# EAGLE board rev0 (EAGLE 9.6.2)
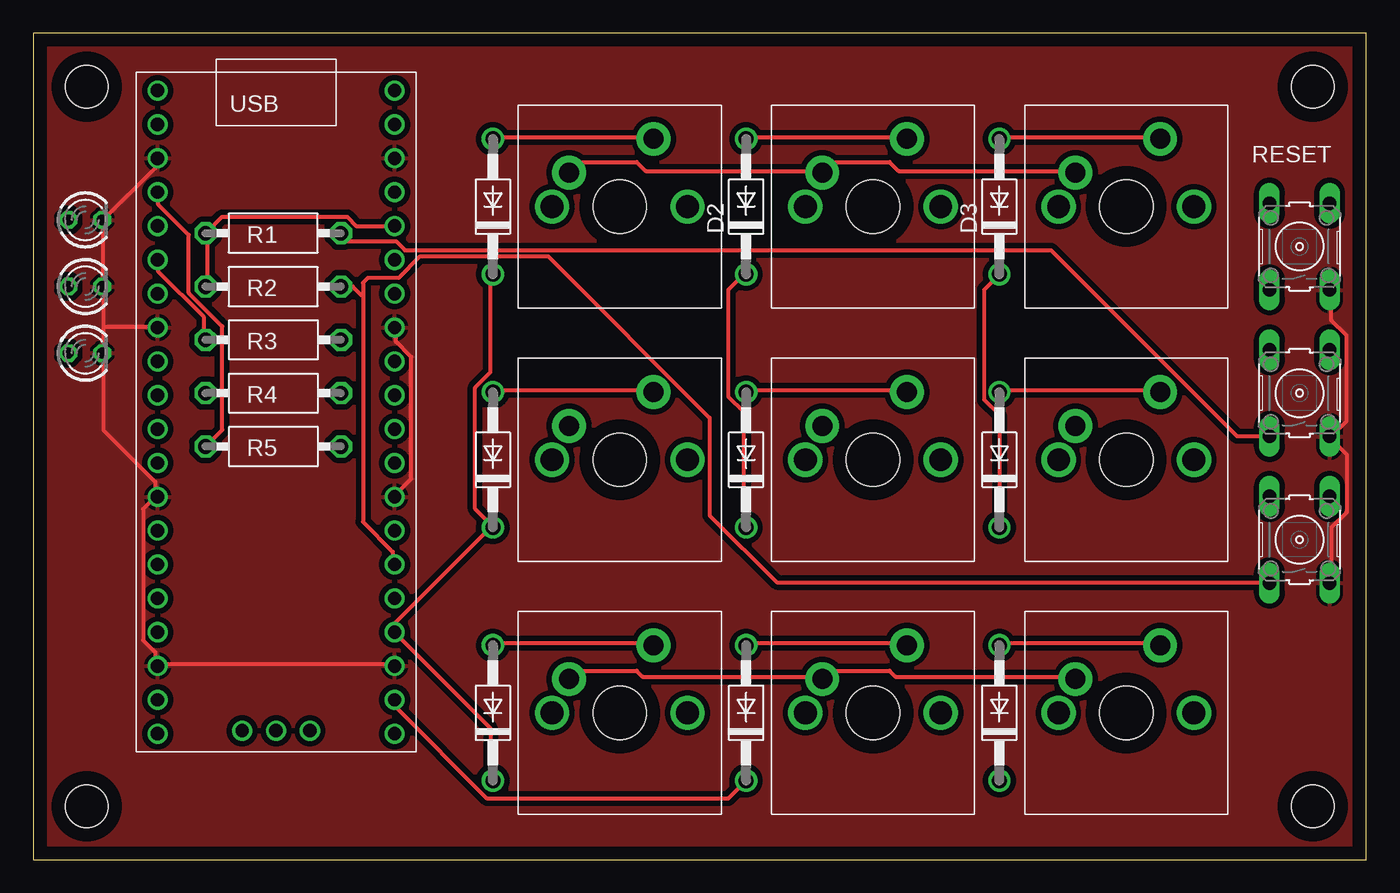
[diagram p0: board, top side]
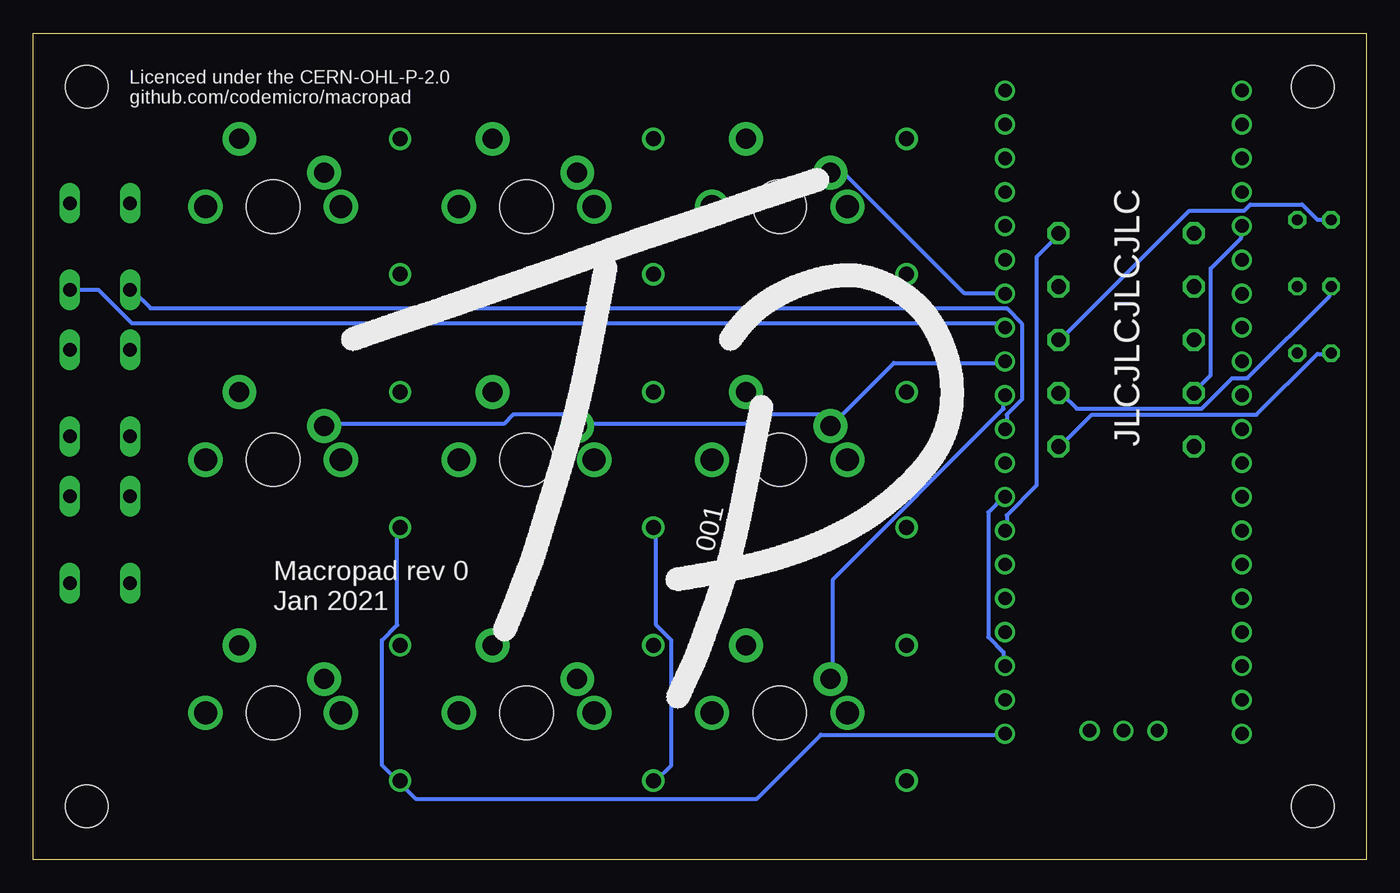
[diagram p1: board, bottom side, seen from below]

Size 100 x 62 mm. Coordinates in mm from the lower left corner, seen from the top.
Outline: 0,0 100,0 100,62 0,62 0,0
Copper layers (1*16): Top 0.035mm / dielectric 1.5mm / Bottom 0.035mm
Design rules "default": minimum track width 6mil, minimum drill 0.35mm, track to track 6mil, track to pad 6mil, pad to pad 6mil, via to via 6mil, smd to smd 6mil, copper to edge 40mil, drill to drill 6mil, minimum pad ring 10mil, minimum via ring 8mil, stop-mask expansion 4mil, vias tented up to drill 0mil, thermal gap 10mil
Net classes: 0 default: width 0.305 mm
Holes 3.2 mm at 4,4 96,4 4,58 96,58

## Footprints (pad centres in the part's own frame; a part is rotated, then mirrored left to right if it is on the bottom)
DO41-10 = drill 1.118: A 5.08,0; C -5.08,0
LED3MM = drill 0.813 octagon: A -1.27,0; K 1.27,0
VMTA55 = drill 1.1 octagon: 1 -5.08,0; 2 5.08,0
B3F-10XX = drill 1.016 long: 1 -3.251,2.261; 2 3.251,2.261; 3 -3.251,-2.261; 4 3.251,-2.261
CHERRY-MX = drill 1.714 pad 1.93: P$3 -5.08,0; P$4 5.08,0 | drill 1.5 pad 2.54: SW1 -3.81,2.54; SW2 2.54,5.08 | hole 4: 0,0
FT_RASPBERRY-PI-PICO_TH = drill 1: 1 -8.55,24.03; 2 -8.55,21.49; 3 -8.55,18.95; 4 -8.55,16.41; 5 -8.55,13.87; 6 -8.55,11.33; 7 -8.55,8.79; 8 -8.55,6.25; 9 -8.55,3.71; 10 -8.55,1.17; 11 -8.55,-1.37; 12 -8.55,-3.91; 13 -8.55,-6.45; 14 -8.55,-8.99; 15 -8.55,-11.53; 16 -8.55,-14.07; 17 -8.55,-16.61; 18 -8.55,-19.15; 19 -8.55,-21.69; 20 -8.55,-24.23; 21 9.23,-24.23; 22 9.23,-21.69; 23 9.23,-19.15; 24 9.23,-16.61; 25 9.23,-14.07; 26 9.23,-11.53; 27 9.23,-8.99; 28 9.23,-6.45; 29 9.23,-3.91; 30 9.23,-1.37; 31 9.23,1.17; 32 9.23,3.71; 33 9.23,6.25; 34 9.23,8.79; 35 9.23,11.33; 36 9.23,13.87; 37 9.23,16.41; 38 9.23,18.95; 39 9.23,21.49; 40 9.23,24.03; GND 0.34,-24; SWCLK -2.2,-24; SWDIO 2.88,-24

## Placement (x,y rotation side)
D1  1N4004  [DO41-10]  34.48,49 90 top
D2  1N4004  [DO41-10]  53.48,49 90 top
D3  1N4004  [DO41-10]  72.48,49 90 top
D4  1N4004  [DO41-10]  34.48,30 90 top
D5  1N4004  [DO41-10]  53.48,30 90 top
D6  1N4004  [DO41-10]  72.48,30 90 top
D7  1N4004  [DO41-10]  34.48,11 90 top
D8  1N4004  [DO41-10]  53.48,11 90 top
D9  1N4004  [DO41-10]  72.48,11 90 top
LED1  TLLG4400  [LED3MM]  3.9,48 0 top
LED2  TLLG4400  [LED3MM]  3.9,43 0 top
LED3  TLLG4400  [LED3MM]  3.9,38 0 top
R1  9.76k  [VMTA55]  18,47 0 top
R2  9.76k  [VMTA55]  18,43 0 top
R3  453  [VMTA55]  18,39 180 top
R4  453  [VMTA55]  18,35 180 top
R5  453  [VMTA55]  18,31 180 top
S1  [B3F-10XX]  95,24 90 top
S2  [B3F-10XX]  95,35 90 top
S3  RESET  [B3F-10XX]  95,46 90 top
U1  CHERRY-MX  [CHERRY-MX]  44,49 0 top
U2  CHERRY-MX  [CHERRY-MX]  63,49 0 top
U3  CHERRY-MX  [CHERRY-MX]  82,49 0 top
U4  CHERRY-MX  [CHERRY-MX]  44,30 0 top
U5  CHERRY-MX  [CHERRY-MX]  63,30 0 top
U6  CHERRY-MX  [CHERRY-MX]  82,30 0 top
U7  CHERRY-MX  [CHERRY-MX]  44,11 0 top
U8  CHERRY-MX  [CHERRY-MX]  63,11 0 top
U9  CHERRY-MX  [CHERRY-MX]  82,11 0 top
U$1  RASPBERRY-PI-PICO_TH  [FT_RASPBERRY-PI-PICO_TH]  17.87,33.67 0 top

## Library data of the parts
D1-D9 = diode
LED1-LED3 = led; MF: VISHAY SEMICONDUCTOR; OC_FARNELL: 1612435
R1-R5 = rcl; SPICEPREFIX: R
S1-S3 = switch-omron; MPN: B3F-1000; OC_FARNELL: 176432; OC_NEWARK: 36M3542
U1-U9 = cherrymx
U$1 = pipico

## Nets
GND: LED1.K LED2.K LED3.K S1.3 S2.3 S3.3 U$1.3 U$1.8 U$1.13 U$1.18 U$1.23 U$1.28 U$1.33 U$1.38
N$1: LED2.A R4.1
N$2: LED1.A R3.1
N$3: LED3.A R5.1
N$4: R1.2 S2.1 U$1.27
N$5: R5.2 U$1.4
N$6: R4.2 U$1.5
N$7: R3.2 U$1.6
N$9: R2.2 S1.1 U$1.26
N$12: R1.1 R2.1 U$1.36
N$13: S3.1 U$1.30
N$15: D1.C D4.C D7.C U$1.24
N$16: D2.C D5.C D8.C U$1.22
N$17: D3.C D6.C D9.C U$1.21
N$18: D6.A U6.SW2
N$19: D3.A U3.SW2
N$20: D9.A U9.SW2
N$21: D8.A U8.SW2
N$22: D5.A U5.SW2
N$23: D2.A U2.SW2
N$24: D1.A U1.SW2
N$25: D4.A U4.SW2
N$26: D7.A U7.SW2
N$27: U1.SW1 U2.SW1 U3.SW1 U$1.34
N$28: U4.SW1 U5.SW1 U6.SW1 U$1.32
N$29: U7.SW1 U8.SW1 U9.SW1 U$1.31

## Tracks (layer width: path | path; a pad name or v marks a point on that pad's centre or on a via)
GND
  Top 0.305: 5.26,40.01 5.26,42.98 LED2.K 5.26,43.2 5.26,47.78 LED1.K 5.26,48.01 9.14,51.89 9.14,52.58 U$1.3 | 5.26,40.01 5.26,38.18 LED3.K 5.26,37.95 5.26,32.23 9.14,28.35 9.14,27.43 U$1.13 9.14,27.2 8.23,26.29 8.23,16.46 9.14,15.54 9.14,14.63 U$1.18 9.37,14.63 26.98,14.63 U$1.23 | 5.26,40.01 9.14,40.01 U$1.8 | S1.3 97.38,20.8 97.38,24.92 98.53,26.06 98.53,30.4 97.38,31.55 S2.3 97.38,31.77 98.53,32.92 98.53,39.32 97.38,40.46 97.38,42.75 S3.3 | U$1.33 27.2,39.78 27.2,38.86 28.35,37.72 28.35,28.57 27.2,27.43 U$1.28
  Bottom 0.305: U$1.23 27.2,14.63 27.2,15.54 28.35,16.69 28.35,26.06 27.2,27.2 U$1.28 | S3.3 97.16,42.75 95.1,42.75 92.58,40.23 27.43,40.23 27.2,40.01 U$1.33
  pour Top (isolate 0.406): 0,62 0,0 100,0 100,62
N$1
  Bottom 0.305: LED2.A 2.74,42.98 2.74,42.29 8.91,36.12 10.06,36.12 12.34,33.83 21.72,33.83 22.86,34.98 R4.1
N$2
  Bottom 0.305: LED1.A 2.74,48.01 3.66,48.01 4.8,49.15 8.69,49.15 9.14,48.69 13.26,48.69 22.86,39.09 R3.1
N$3
  Bottom 0.305: LED3.A 2.74,37.95 3.66,37.95 8.23,33.38 20.57,33.38 22.86,31.09 R5.1
N$4
  Top 0.305: S2.1 92.58,31.77 90.3,31.77 76.35,45.72 27.89,45.72 27.2,46.41 23.55,46.41 23.09,46.86 R1.2
  Bottom 0.305: U$1.27 26.98,24.69 26.98,25.83 24.73,28.07 24.73,45.22 23.09,46.86 R1.2
N$5
  Top 0.305: U$1.4 9.37,50.06 9.37,49.15 11.66,46.86 11.66,42.52 14.17,40.01 14.17,32.23 13.03,31.09 R5.2
N$6
  Bottom 0.305: U$1.5 9.37,47.32 9.37,46.63 11.66,44.35 11.66,36.35 12.8,35.2 R4.2
N$7
  Top 0.305: U$1.6 9.37,44.81 9.37,44.12 12.8,40.69 12.8,39.09 R3.2
N$9
  Top 0.305: 24.73,42.33 24.73,43.28 25.11,43.66 27.43,43.66 29.03,45.26 38.63,45.26 50.75,33.15 50.75,25.83 55.78,20.8 92.58,20.8 S1.1 | 24.73,42.33 24.73,25.33 26.98,23.09 26.98,22.17 U$1.26 | R2.2 23.96,43 24.68,42.28 24.73,42.33
N$12
  Top 0.305: U$1.36 26.98,47.55 24.23,47.55 23.55,48.23 14.17,48.23 13.03,47.09 R1.1 13.03,46.86 13.03,43.2 R2.1
N$13
  Bottom 0.305: U$1.30 26.98,32.46 26.98,33.38 25.83,34.52 25.83,40.23 26.98,41.38 91.21,41.38 92.58,42.75 S3.1
N$15
  Top 0.305: D7.C 34.29,5.94 34.29,9.83 27.2,16.92 U$1.24 27.2,17.14 27.2,17.83 34.29,24.92 D4.C 34.29,25.15 33.15,26.29 33.15,35.43 34.29,36.58 34.29,43.89 D1.C
N$16
  Top 0.305: D5.C 53.26,25.15 53.26,33.6 52.12,34.75 52.12,42.75 53.26,43.89 D2.C | U$1.22 27.2,11.89 27.2,11.43 34.06,4.57 52.12,4.57 53.26,5.71 D8.C
  Bottom 0.305: D5.C 53.26,24.92 53.26,17.6 52.12,16.46 52.12,7.09 53.26,5.94 D8.C
N$17
  Top 0.305: D6.C 72.47,25.15 72.47,33.38 71.32,34.52 71.32,42.75 72.47,43.89 D3.C
  Bottom 0.305: U$1.21 27.2,9.37 40.92,9.37 45.72,4.57 71.32,4.57 72.47,5.71 D9.C 72.69,5.94 73.84,7.09 73.84,16.46 72.69,17.6 72.69,24.92 D6.C
N$18
  Top 0.305: D6.A 72.69,35.2 84.35,35.2 U6.SW2
N$19
  Top 0.305: D3.A 72.69,54.18 84.35,54.18 U3.SW2
N$20
  Top 0.305: D9.A 72.69,16.23 84.35,16.23 U9.SW2
N$21
  Top 0.305: D8.A 53.48,16.23 65.38,16.23 U8.SW2
N$22
  Top 0.305: D5.A 53.49,35.2 65.38,35.2 U5.SW2
N$23
  Top 0.305: D2.A 53.49,54.18 65.38,54.18 U2.SW2
N$24
  Top 0.305: D1.A 34.52,54.18 46.41,54.18 U1.SW2
N$25
  Top 0.305: D4.A 34.52,35.2 46.41,35.2 U4.SW2
N$26
  Top 0.305: D7.A 34.52,16.23 46.41,16.23 U7.SW2
N$27
  Top 0.305: U1.SW1 40.23,51.66 40.92,52.35 45.26,52.35 45.95,51.66 58.98,51.66 U2.SW1 59.21,51.66 59.89,52.35 64.24,52.35 64.92,51.66 78.18,51.66 U3.SW1
  Bottom 0.305: U$1.34 27.2,42.52 30.18,42.52 39.09,51.44 40.01,51.44 U1.SW1
N$28
  Bottom 0.305: U$1.32 27.2,37.26 35.43,37.26 40.01,32.69 U4.SW1 40.23,32.69 40.92,33.38 45.03,33.38 45.72,32.69 58.98,32.69 U5.SW1 59.21,32.69 59.89,33.38 64.01,33.38 64.69,32.69 78.18,32.69 U6.SW1
N$29
  Top 0.305: U7.SW1 40.23,13.72 40.69,14.17 45.26,14.17 45.72,13.72 58.98,13.72 U8.SW1 59.21,13.72 59.66,14.17 64.24,14.17 64.69,13.72 78.18,13.72 U9.SW1
  Bottom 0.305: U$1.31 27.2,34.75 27.2,33.83 40.01,21.03 40.01,13.72 U7.SW1

## Text on the board
bPlace: Licenced under the CERN-OHL-P-2.0 / github.com/codemicro/macropad | JLCJLCJLCJLC | 001 | Macropad rev 0 / Jan 2021
Document: Copyright Thomas Pain 2021 / / This source describes Open Hardware and is licensed under the CERN-OHL-P / v2 / / You may redistribute and modify this documentation and make products / using it under the terms of the CERN-OHL-P v2 (https:/cern.ch/cern-ohl). / This documentation is distributed WITHOUT ANY EXPRESS OR IMPLIED / WARRANTY, INCLUDING OF MERCHANTABILITY, SATISFACTORY QUALITY AND FITNESS / FOR A PARTICULAR PURPOSE. Please see the CERN-OHL-P v2 for applicable / conditions / / https://github.com/codemicro/macropad